# Altium PCB UVMeter.PcbDoc
Units mm, origin at the board's own origin, x right, y up, seen from the top; angles counter-clockwise.
Board outline 13.1 x 10 mm, 2 copper layers (Top Layer, Bottom Layer), stack 0.972 mm thick; 23 components, 15 nets, 87 pads, 15 vias.
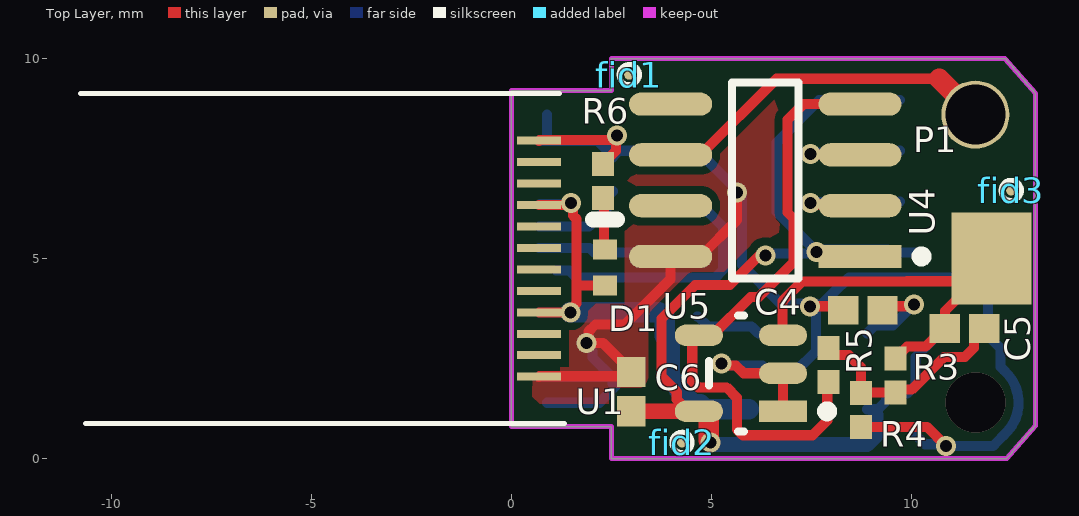
[diagram p0: Top Layer view]
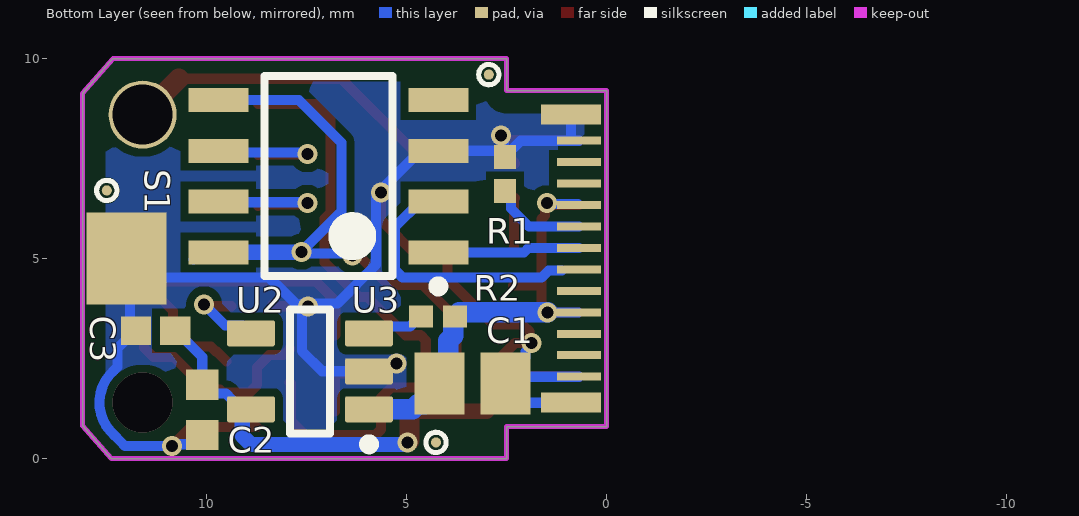
[diagram p1: Bottom Layer view, seen from below]

## Layer stack, top to bottom
Top Solder: solder mask 0.01, Solder Resist, Dk 3.5
Top Layer: signal copper 0.036
Dielectric 1: dielectric 0.9, FR-4, Dk 4.8
Bottom Layer: signal copper 0.036
Bottom Solder: solder mask 0.01, Solder Resist, Dk 3.5

## Board outline
0,0.8 2.5,0.8 2.5,0 12.384,0 13.1,0.824 13.1,9.134 12.346,10 2.5,10 2.5,9.2 0,9.2

## Design rules (kind name [scope] priority, off if disabled: settings)
BoardOutlineClearance [All] p1: gap=0 ignorepadtopadclearanceinfootprint=FALSE
Clearance Clearance_3 [OnLayer('Keep-Out Layer')] p1: gap=0 ignorepadtopadclearanceinfootprint=FALSE
Clearance Clearance_2 [InNamedPolygon('Top Layer-No Net')] p2: gap=0.254 ignorepadtopadclearanceinfootprint=FALSE except(0: Arc-Hole Track-Hole SMDPad-Hole THPad-Hole Via-Hole Fill-Hole Poly-Hole Region-Hole Text-Hole)
Clearance Clearance_1 [InNamedPolygon('Top Layer-No Net')] p3: gap=0.254 ignorepadtopadclearanceinfootprint=FALSE
Clearance [All] p4: gap=0.203 ignorepadtopadclearanceinfootprint=FALSE
ComponentClearance [All] p1: gap=0.203 collisioncheckmode=3 verticalgap=0.203 showdistances=FALSE
HoleSize [All] p1: absolutevalues=TRUE maxlimit=10.16 minlimit=0.203 maxpercent=80.000 minpercent=20.000
MinimumSolderMaskSliver [All] p1: minsoldermaskwidth=0.102
PlaneClearance [All] p1: clearance=0
PlaneConnect [All] p1: planeconnectstyle=Direct reliefexpansion=0.508 reliefentries=4 reliefconductorwidth=0.254 reliefairgap=0.254
PolygonConnect [All] p1: connectstyle=Direct reliefconductorwidth=0.254 reliefentries=4 polygonreliefangle="90 Angle" airgapwidth=0.254
RoutingVias [All] p1: holewidth=0.3 width=0.5 viastyle="Through Hole" minholewidth=0.3 minwidth=0.5 maxholewidth=0.3 maxwidth=0.5
SilkToSilkClearance [All] p1: silktosilkclearance=0.102
SilkToSolderMaskClearance [IsPad] p1: minsilkscreentomaskgap=0.025 clearancetoexposedcopper=TRUE
SolderMaskExpansion [All] p1: expansion=0.025 istentingtop=FALSE
Width [All] p1: maxlimit=1.016 minlimit=0.203 preferedwidth=0.254
23 further rules are at their usual default settings.

## Components (designator, comment, footprint, x,y, rotation, side; value= is the part's Value field where it differs from the comment)
C1 "" CAPC2014X150X70NL20 3.353,1.88 r180 bottom value=22uF
C2 "" FP-CL10-IPC_C 10.109,1.219 r270 bottom
C3 "" CAPC1005X55X25ML05T10 11.278,3.2 r180 bottom value=100nF
C4 "" CAPC1005X55X25ML05T10 8.788,3.708 r0 top value=22nF
C5 "" CAPC1005X55X25ML05T10 11.328,3.251 r180 top value=100nF
C6 "" CAPC1005X55X25ML05T10 2.997,1.676 r270 top value=100nF
D1 "SML-P11MTT86" ROHM-SML-P11MT_V 2.337,4.775 r90 top
fid1 "FIDUCIAL" FIDUCIAL 2.946,9.601 r90 top
fid2 "FIDUCIAL" FIDUCIAL 4.267,0.406 r90 top
fid3 "FIDUCIAL" FIDUCIAL 12.497,6.706 r90 top
P1 "UDPI_PO_Jig" UDPI 11.582,7.417 r90 top
R1 "" RESC1005X40X25NL05T10 2.54,7.112 r270 bottom value=5.1K
R2 "" RESC1005X40X25NL05T10 4.216,3.556 r180 bottom value=1K
R3 "" RESC1005X40X25NL05T10 9.601,2.083 r90 top value=1M
R4 "" RESC1005X40X25NL05T10 8.738,1.219 r90 top value=1K
R5 "" RESC1005X40X25NL05T10 7.925,2.337 r270 top value=3.3K
R6 "" RESC1005X40X25NL05T10 2.29,6.945 r270 top value=1K
S1 "GUVA-UV" GUVA-S12SD 12,5 r270 bottom
U1 "USB C - Plug A06" "USB C - Plug A06" 0.695,5 r270 top
U2 "RT9193-33GB" DBV0005A_M 7.417,2.184 r0 bottom
U3 "CH340N" CH340N 6.96,7.061 r0 bottom
U4 "ATTINY402-SSN" FP-C04-057-SWB-IPC_B 6.35,6.96 r180 top
U5 "LMV321LILT" FP-SOT23-5-GAMS1812131437-IPC_C 5.74,2.134 r180 top

## Footprints (in the part's own frame and the unit in brackets; to place one, negate y for a bottom-side part, rotate by r counter-clockwise, add the part's x,y. Pads: shape width x height; smd on the part's side, far side on the other; paste and mask are expansions set on the pad)
CAPC1005X55X25ML05T10 [mm] "Chip Capacitor, 2-Leads, Body 1.00x0.50mm, IPC Low Density"
  rect 0.76x0.72 smd: 1(-0.49,0) 2(0.49,0)
  body extent -0.53,-0.28 0.53,0.27, height 0.55
CAPC2014X150X70NL20 [mm] "Chip Capacitor, 2-Leads, Body 2.00x1.35mm, IPC Medium Density"
  rect 1.25x1.55 smd: 1(-0.825,0) 2(0.825,0)
  body extent -1.1,-0.77 1.1,0.77, height 1.5
CH340N [mm] "SOP, 8-Leads, Body 4.90x3.90mm, Pitch 1.27mm, IPC Medium Density"
  rect 1.5x0.6 smd: 1(-2.75,1.905) 2(-2.75,0.635) 3(-2.75,-0.635) 4(-2.75,-1.905) 5(2.75,-1.905) 6(2.75,-0.635) 7(2.75,0.635) 8(2.75,1.905)
  silkscreen extent -2.87,-2.5 1.6,2.88, body extent -2,-2.5 2,2.5, height 1.75
DBV0005A_M [mm] "SOT23, 5-Leads, Body 3.05x1.75mm, Pitch 0.95mm, IPC Low Density"
  rrect15% 1.2x0.65 smd: 1(-1.475,0.95) 2(-1.475,0) 3(-1.475,-0.95) 4(1.475,-0.95) 5(1.475,0.95)
  silkscreen extent -1.6,-1.55 0.5,1.95, body extent -1.42,-1.46 1.42,1.46, height 1.08
FIDUCIAL [mil]
  round 10 smd paste+0 mask+0: 0(0,0)
  round 10 smd far side paste+0 mask+0: 0(0,0)
  silkscreen extent -10,-10 10,10
FP-C04-057-SWB-IPC_B [mm]
  rect 2.077x0.582 smd paste+0 mask+0: 1(-2.368,1.905)
  rrect100% 2.077x0.582 smd paste+0 mask+0: 2(-2.368,0.635) 3(-2.368,-0.635) 4(-2.368,-1.905) 5(2.368,-1.905) 6(2.368,-0.635) 7(2.368,0.635) 8(2.368,1.905)
  silkscreen extent -4.03,-2.45 0.83,2.45, body extent -3.66,-2.7 3.66,2.7, height 0.25
FP-CL10-IPC_C [mm]
  rect 0.758x0.812 smd paste+0 mask+0: 1(-0.627,0) 2(0.627,0)
  body extent -0.8,-0.4 0.8,0.4, height 0.9
FP-SOT23-5-GAMS1812131437-IPC_C [mm]
  rect 1.205x0.536 smd paste+0 mask+0: 1(-1.051,0.95)
  rrect100% 1.205x0.536 smd paste+0 mask+0: 2(-1.051,0) 3(-1.051,-0.95) 4(1.051,-0.95) 5(1.051,0.95)
  silkscreen extent -2.28,-1.45 0.8,1.45, body extent -1.75,-1.55 1.75,1.55, height 0.25
GUVA-S12SD [mm]
  rect 2.3x2 smd: 1(0,0)
  rect 2.3x2 smd far side: 2(0,0)
RESC1005X40X25NL05T10 [mm] "Chip Resistor, 2-Leads, Body 1.00x0.50mm, IPC Medium Density"
  rect 0.6x0.55 smd: 1(-0.425,0) 2(0.425,0)
  body extent -0.53,-0.27 0.53,0.28, height 0.4
ROHM-SML-P11MT_V [mm] "SMD, 2-Leads, Body 0.6x1mm"
  rect 0.5x0.6 smd: 1(-0.45,0) 2(0.45,0)
  silkscreen extent 1.2,-0.3 1.2,0.3, body extent -0.5,-0.3 0.5,0.3, height 0.25
UDPI [mm]
  round 1.7 hole 1.5: 1(1.183,-0.018)
"USB C - Plug A06" [mm]
  rect 0.2x1.1 smd: A1(2.95,0) A2(2.414,0) A3(1.878,0) A4(1.342,0) A5(0.806,0) A6(0.27,0) A7(-0.27,0) A8(-0.806,0) A9(-1.342,0) A10(-1.878,0) A11(-2.414,0) A12(-2.95,0)
  rect 0.5x1.5 smd far side: B1(-3.6,0.2) B1(3.6,0.2)
  rect 0.2x1.1 smd far side: B1(-2.95,0) B2(-2.414,0) B3(-1.878,0) B4(-1.342,0) B5(-0.806,0) B6(-0.27,0) B7(0.27,0) B8(0.806,0) B9(1.342,0) B10(1.878,0) B11(2.414,0) B12(2.95,0)
  silkscreen extent -4.13,-11.46 4.13,0.64

## Part data
C1: library part CMP-2007-00031-1, "CAP TANT 22UF 20% 6.3V 0805", Manufacturer="AVX Interconnect / Elco", Part Number=TACR226M006XTA, MK=TMCP0J226MTRF
C2: library part CMP-13271-001938-1, "CAP CER 10UF 6.3V X5R 0603", Capacitance=10uF, Case Code (Imperial)=0603, Case Code (Metric)=1608, Dielectric=X5R, Max Operating Temperature=85°C, Min Operating Temperature=-55°C, Package Quantity=1, Tolerance=20%, Voltage=6.3V, Case/Package=0603, Contact Plating=Tin, Depth=0.8mm, Height=0.8mm, Length=1.6mm, Mount="Surface Mount", Packaging="Tape and Reel", Radiation Hardening=No, Thickness=0.035inch, Voltage Rating=6.3V, Width=0.031inch
C3 C4 C5 C6: library part CMP-2008-04658-1, Manufacturer=Murata, Part Number=GRM155R71H332KA01D
  C3 C5 C6: MK=JMK107BJ106MA-T
  C4: MK=0402B223K160CT
D1: library part CMP-2000-07126-1, "LED Green, 54 mW, 20 mA, -40 to 85 degC, 2-Pin SMD, RoHS, Tape and Reel", Color=Green, Forward (Drive) Current=20mA, Forward Voltage=1.9V, Manufacturer=Rohm, Package Description="2-Pin Surface Mount Device, Body 0.6 x 1 mm", Package Reference=SML-P11MT, Datasheet URL=https://datasheet.ciiva.com/16201/sml-p11mtt86-16201197.pdf, Datasheet Version="Rev. 2.0, 08/2012", Dimension=1x0.6x0.2mm, Intensity=2.1mcd, Lens Type=Clear, Manufacturer URL=http://www.rohm.com/web/global/, Mounting Technology=SurfaceMount
R1 R2 R6: library part CMP-1011-00001-2, Manufacturer="Yageo / Phycomp", Part Number=RC0402JR-070RL, Tolerance=5%
R3 R4 R5: library part CMP-1011-00001-2, Manufacturer="Yageo / Phycomp", Part Number=RC0402JR-070RL, Tolerance=.1%
U2: library part CMP-0394-00352-2, "IC REG LINEAR 3.3V 300MA SOT23-5", Manufacturer="Texas Instruments", PartNumber=TPS76901HDBVT, Rating="High Temp", Accuracy(%)=3, Code_JEDEC=MO-178, ComponentLink1Description="Manufacturer URL", ComponentLink1URL=http://www.ti.com/, ComponentLink2Description=Datasheet, ComponentLink2URL=http://www.ti.com/general/docs/lit/getliterature.tsp?genericPartNumber=TPS76901-HT&fileType=pdf, ComponentLink3Description="Package Specification", ComponentLink3URL=http://www.ti.com/litv/pdf/mpds018i, ComponentLink4Description="URL Link1", ComponentLink4URL="Samples URL:http://www.ti.com/product/tps76901-ht#samples", DatasheetVersion=SLVS959C, Eco-Plan="Green (RoHS & no Sb/Br)", Iout(Max)(A)=0.1, Iq(Typ)(mA)=0.3, MK=RT9193-33GB, Mounting Technology="Surface Mount", PackageDescription="5-Pin Plastic Small Outline, Body 1.60 Ãƒâ€” 2.90 mm, Pitch 0.95 mm", PackageReference=DBV0005A, PackageVersion=4073253-4/K, SubFamily="Single Channel LDO", Vdo(Typ)(mV)=71, Vin(Max)(V)=10, Vin(Min)(V)=5, Vout Adj(Max)(V)=4.5, Vout Adj(Min)(V)=1.2
U3: "USB to serial chip", Package=SOP8
U4: library part CMP-06276-000169-1, "20MHZ 4KB SOIC8 IND 105C GREEN T", RoHS Compliant=Yes
U5: library part CMP-12131-000010-1, "IC OPAMP GP 1 CIRCUIT SOT23-5", Ambient Temperature Range High=+125°C, Ambient Temperature Range Low=-40°C, Input Bias Current=0.027uA, Input Offset Voltage=1mV, Manufacturer=STMicroelectronics, Max Junction Temp=+150°C, Max Supply Voltage=5.5V, Min Supply Voltage=2.7V, Nominal Supply Current=120-130uA, Output Current Per Channel=43mA, Package=SOT23-5-GAMS1812131437CB, Temperature="-40°C to +125°C", Voltage Gain=90dB, Automotive=No, Category=IC, ComponentLink2Description=Datasheet, ComponentLink2URL=https://www.st.com/resource/en/datasheet/lmv321l.pdf, Device Class L1="Integrated Circuits (ICs)", Device Class L2="Linear ICs", Device Class L3="Amplifiers - Op Amps", Digikey Description="IC OPAMP GP 1 CIRCUIT SOT23-5", Gain Bandwidth=1.3MHz, Height=1.45mm, Ipc Land Pattern Name=SOT95P280X120-5, Lead Free=Yes, Manufacturer Part Number=LMV321LILT, Mouser Description="Operational Amplifiers - Op Amps 1.3MHz LP Gen Op-Amp 250uA at 5V 7mV 25c", Number Of Channels=1, Octopart=https://octopart.com/lmv321lilt-stmicroelectronics-23014004, RoHS=TRUE, Temperature Range High=+125°C, Temperature Range Low=-40°C

## Via types
v1: diameter 0.5, hole 0.3, Top Layer to Bottom Layer, 14 vias
v2: diameter 1.5, hole 1.5, Top Layer to Bottom Layer, 1 vias

## Nets (pads, with @x,y where several pads share a name; then routed paths per layer and width w, separated by ;. In a path a pad name is that pad's centre, name@x,y a point inside that pad or via, vN(x,y) a via of type N, cw(c..) or ccw(c..) an arc to the next point about the centre after c; other vN are vias at no path point)
3V3: C2.1 C3.2 C6.2 U2.5 U3.5 U3.8 U4.1 U5.5 | length 27
  Top Layer w0.254: U5.5@4.446,1.185 4.43,1.185 4.135,1.48 4.135,1.67 3.757,2.048 3.757,3.503 4.597,4.343 5.461,4.343 6.198,5.08 v1(6.35,5.08) ; U5.5@4.688,1.185 U5.5 4.801,1.184 U5.5@4.931,1.053 ; v1@4.931,0.453 v1(4.978,0.406)
  Top Layer w0.381: C6.2 2.999,1.185 U5.5@4.43,1.185 ; U5.5@4.446,1.185 U5.5@4.688,1.185
  Top Layer w0.508: v1@4.931,0.453 U5.5@4.931,1.053
  Bottom Layer w0.254: v1(6.35,5.08) 6.395,5.125 7.588,5.125 v1@7.614,5.151 ; v1(7.633,5.17) 6.633,6.17 6.633,7.903 7.696,8.966 U3.5 ; U3.8 10.16,5.156 U3.8@10.333,4.983 ; C2.1@10.033,1.77 9.889,1.626 9.514,1.626 9.365,1.477 9.365,1.432 U2.5@9.167,1.234 ; C2.1 10.109,2.542 10.768,3.2 C3.2 ; U2.5@9.167,1.234 U2.5 U2.5@9.167,1.234
  Bottom Layer w0.381: v1@4.978,0.356 8.89,0.356 9.113,0.579 U2.5@9.113,1.1 ; v1@7.633,5.163 U3.8@9.391,5.163
D+: U1.B6 U3.1 | length 3.6
  Bottom Layer w0.254: U1.B6 1.954,5.27 2.068,5.156 U3.1
D-: U1.B7 U3.2 | length 6.7
  Bottom Layer w0.254: U1.B7@1.118,4.703 1.451,4.703 1.628,4.526 5.096,4.526 5.29,4.719 5.29,5.796 4.66,6.426 U3.2
GND: C1.2 C2.2 C3.1 C4.1 C6.1 R1.1 R4.1 R6.1 S1.1 U1.A1 U1.A12 U1.B1 U1.B12 U2.2 U3.3 U4.8 U5.1 U5.2 | length 50.3
  Top Layer w0.254: U1.A1 0.707,2.061 C6.1@2.872,2.061 ; U1.A12 0.708,7.963 v1@2.642,7.963 ; R6.1 2.29,7.395 2.438,7.543 2.463,7.543 2.614,7.694 2.614,7.964 v1@2.642,7.964 ; C6.1 2.816,2.166 2.764,2.218 2.764,2.419 2.288,2.896 v1(1.88,2.896) 1.927,2.943 1.927,3.176 2.104,3.353 2.838,3.353 3.982,4.498 U4.8 4.73,5.055 5.639,5.963 v1(5.639,6.655) ; v1(5.256,2.375) 5.303,2.327 5.614,2.327 5.808,2.134 U5.2 U5.1 ; v1(7.468,3.81) 8.298,3.81 C4.1@8.349,3.861 ; R4.1 10.39,0.794 v1(10.871,0.313)
  Bottom Layer w0.254: U1.B12 2.54,2.05 2.54,1.892 C1.2 ; U1.B1@0.695,7.95 U1.B1@0.868,7.95 ; U1.B1@0.895,1.4 2.201,1.4 C1.2@2.604,1.803 ; U1.B1@0.895,8.6 0.895,7.977 U1.B1@0.868,7.95 ; v1(1.88,2.896) 1.88,2.829 2.03,2.679 2.03,2.528 C1.2@2.507,2.05 ; R1.1 2.54,7.562 2.152,7.95 U1.B1@0.868,7.95 ; v1(2.642,8.077) 2.565,8.001 2.565,7.574 2.688,7.696 U3.3 4.66,7.696 v1@5.686,6.67 ; v1(5.256,2.375) 5.303,2.327 6.272,2.327 6.415,2.184 7.112,2.184 7.62,2.692 v1@7.62,3.883 ; v1(5.639,6.655) 5.77,6.524 5.77,4.84 6.726,3.883 v1@7.468,3.883 ; v1(7.468,3.81) 7.708,3.81 8.237,4.339 8.251,4.339 8.438,4.526 11.526,4.526 S1.1@11.92,4.92 ; C2.2 10.341,0.361 10.824,0.361 v1(10.871,0.313) 12.041,0.313 12.181,0.453 12.23,0.502 cw(c12.445,0.368) 12.283,0.564 ccw(c11.6,1.4) 12.31,2.214 12.304,2.22 12.23,2.294 12.23,2.758 11.854,3.134 11.788,3.2 C3.1 ; C3.1@11.92,3.2 S1.1@11.92,4.92 ; S1.1 S1.1@11.92,4.92
NetC4_2: C4.2 U2.4 | length 2.2
  Top Layer w0.254: C4.2@9.38,3.81 10.018,3.81 v1(10.065,3.857)
  Bottom Layer w0.254: U2.4 9.09,3.332 9.54,3.332 v1(10.065,3.857)
NetC5_1: C5.1 R3.1 R4.2 R5.1 | length 5.4
  Top Layer w0.254: R5.1 7.925,2.737 8.073,2.589 8.435,2.589 8.738,2.286 8.738,1.847 8.934,1.651 R3.1@9.601,1.651 ; R3.1 9.67,1.726 10.007,1.726 10.82,2.54 11.334,2.54 11.565,2.771 11.565,3.018 11.798,3.251 C5.1
NetC5_2: C5.2 R3.2 S1.2 U5.3 | length 10.1
  Top Layer w0.254: U5.3 6.782,3.093 6.782,3.944 7.27,4.433 9.893,4.433 9.896,4.437 11.36,4.437 11.399,4.399 S1.2 12,4.85 10.842,3.692 C5.2@10.842,3.251 ; R3.2@9.505,2.436 9.749,2.681 9.774,2.681 9.899,2.806 10.358,2.806 C5.2@10.553,3.001
NetD1_2: D1.2 R6.2 | length 1.3
  Top Layer w0.254: R6.2 2.314,6.497 2.314,5.248 D1.2
NetR1_2: R1.2 U1.B5 | length 2.4
  Bottom Layer w0.254: U1.B5 1.945,5.806 2.392,6.253 2.392,6.539 R1.2
NetR2_1: R2.1 U2.3 | length 1.7
  Bottom Layer w0.254: R2.1 4.666,3.556 4.92,3.302 6.007,3.302 U2.3@6.175,3.134
NetU3_6: U3.6 U4.3 | length 3.5
  Top Layer w0.254: v1(7.485,7.614) 7.494,7.604 8.708,7.604 U4.3
  Bottom Layer w0.254: v1(7.485,7.614) 7.526,7.655 9.668,7.655 U3.6
NetU3_7: U3.7 U4.2 | length 3.5
  Top Layer w0.254: v1(7.485,6.394) 7.52,6.36 8.683,6.36 U4.2
  Bottom Layer w0.254: v1(7.485,6.394) 7.501,6.41 9.694,6.41 U3.7
UPDI: P1.1 U4.6 | length 9.2
  Top Layer w0.254: U4.6 4.73,7.595 6.635,9.5 10.7,9.5 ; P1.1@11.573,8.277 P1.1@11.85,8
  Top Layer w0.508: 10.7,9.5 P1.1
UV_OUT: R5.2 U4.4 U5.4 | length 15.5
  Top Layer w0.254: R5.2 7.899,1.886 7.899,0.954 7.53,0.585 5.788,0.585 5.639,0.734 5.639,1.524 5.381,1.782 4.67,1.782 4.521,1.931 4.521,2.953 4.651,3.084 U5.4 5.024,3.084 5.983,4.043 6.186,4.043 7.053,4.91 7.053,6.005 6.904,6.154 6.904,8.471 7.298,8.865 U4.4
Vin: C1.1 D1.1 R2.2 U1.A4 U1.A9 U1.B4 U1.B9 U2.1 | length 13
  Top Layer w0.254: U1.A9 v1@1.494,6.342 ; U1.A4 v1(1.473,3.658) 1.473,3.724 1.56,3.811 1.626,3.877 1.626,4.3 ; v1@1.494,3.745 v1@1.52,3.771 ; v1(1.494,6.386) 1.541,6.339 1.541,6.077 1.633,5.985 1.633,4.325 D1.1
  Bottom Layer w0.254: U1.B9@0.703,3.651 v1@1.604,3.651 ; U1.B4@0.722,6.369 v1@1.492,6.369
  Bottom Layer w0.508: v1(1.473,3.658) 3.69,3.658 R2.2 3.812,3.556 3.833,3.535 3.833,3.071 3.959,2.945 C1.1@3.959,1.948 ; C1.1 4.178,1.73 4.549,1.359 4.722,1.359 4.846,1.234 U2.1
pads on no net: fid1.0 fid2.0 fid3.0 U1.A2 U1.A3 U1.A5 U1.A6 U1.A7 U1.A8 U1.A10 U1.A11 U1.B2 U1.B3 U1.B8 U1.B10 U1.B11 U3.4 U4.5 U4.7
copper on no net:
  other v2: 11.6,1.4

## Polygon pours and split planes (outlines as drawn)
GND on Top Layer "GND_L01_P000" (solid, remove dead copper, pour order 0): 0,10.008 13.259,10.008 13.259,0 0,0
GND on Bottom Layer "GND_L02_P001" (solid, remove dead copper, pour order 1): 0.051,10.008 0.102,10.058 13.208,10.058 13.208,0 0,0

## Keep-outs
Keep-Out Layer:
  the board outline again, w0.127

## Other copper
Top Layer:
  pour cut-out: 0.152,2.083 0.152,2.489 1.219,2.489 1.219,2.083
  pour cut-out: 0.152,7.925 1.219,7.925 1.219,7.518 0.152,7.518
Bottom Layer:
  pour cut-out: 0.152,7.925 1.219,7.925 1.219,7.518 0.152,7.518
  pour cut-out: 0.152,2.489 1.219,2.489 1.219,2.083 0.152,2.083